# Altium PCB Solder Training Tier 1.PcbDoc
Units mil, origin at the board's own origin, x right, y up, seen from the top; angles counter-clockwise.
Board outline 3000 x 2000 mil, 2 copper layers (Top Layer, Bottom Layer); 48 components, 26 nets, 98 pads, 0 vias.
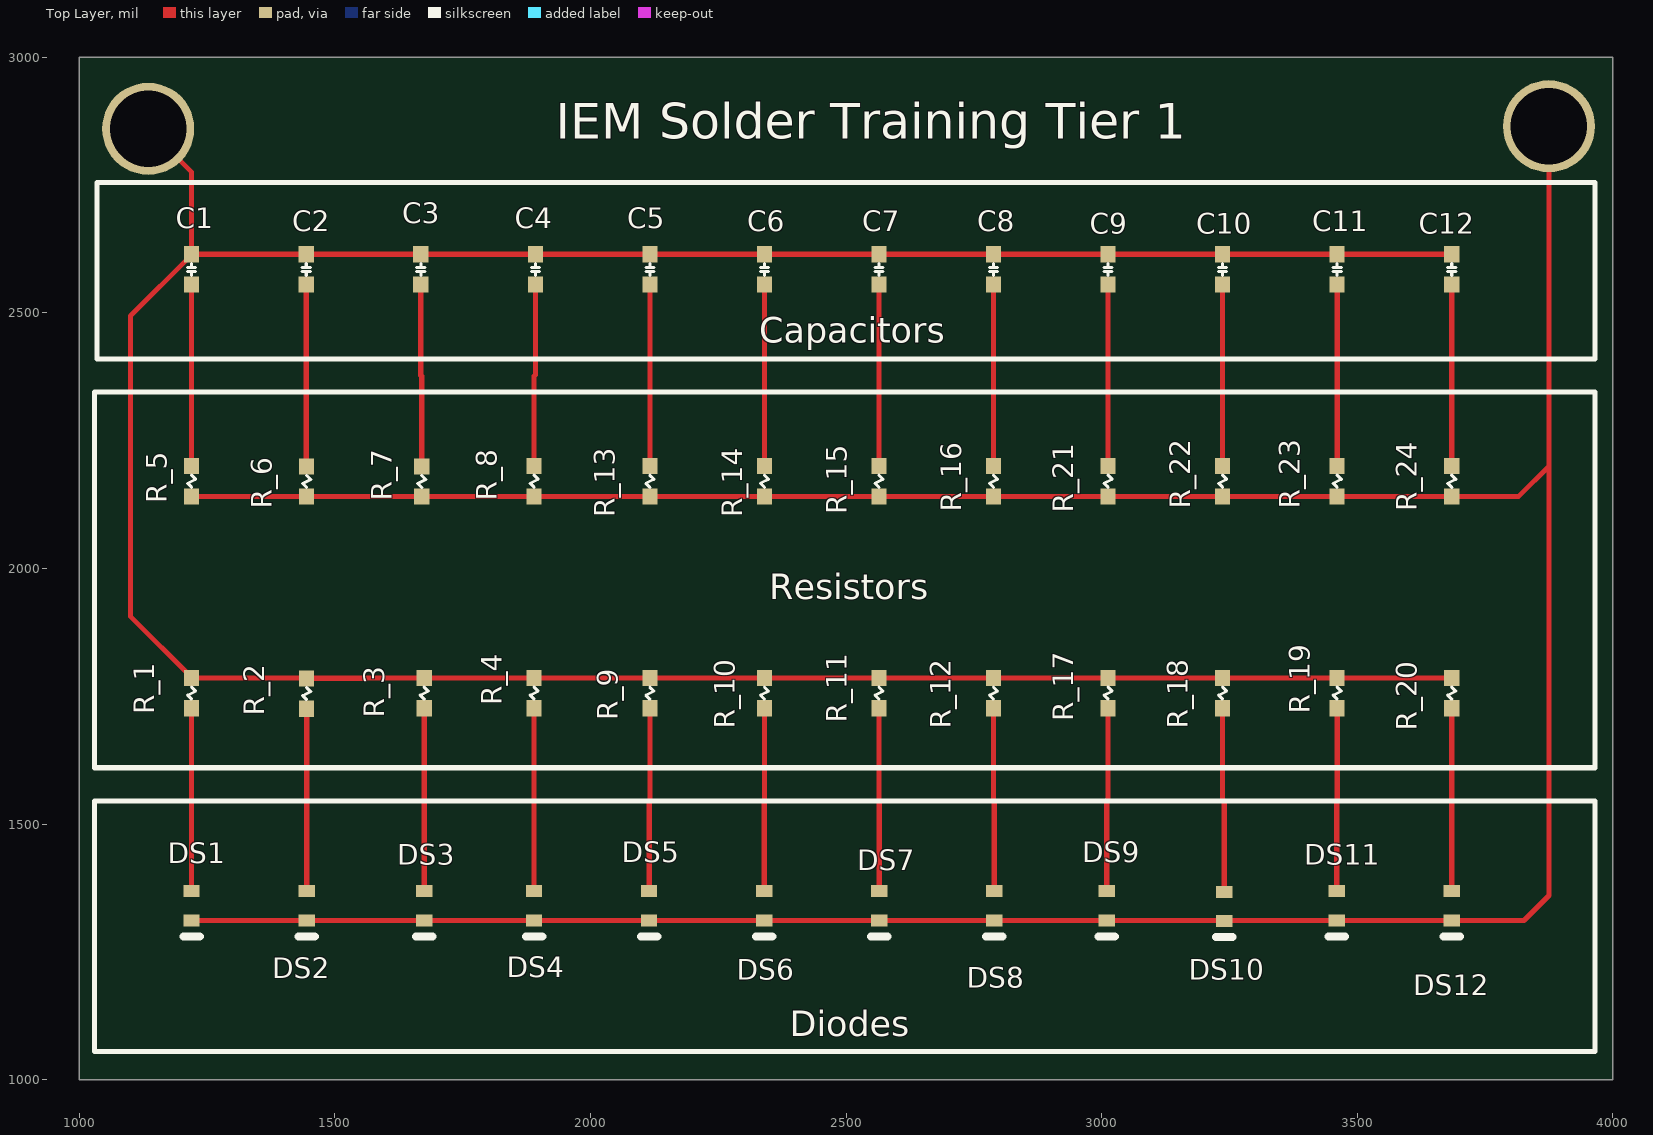
[diagram p0: Top Layer view]
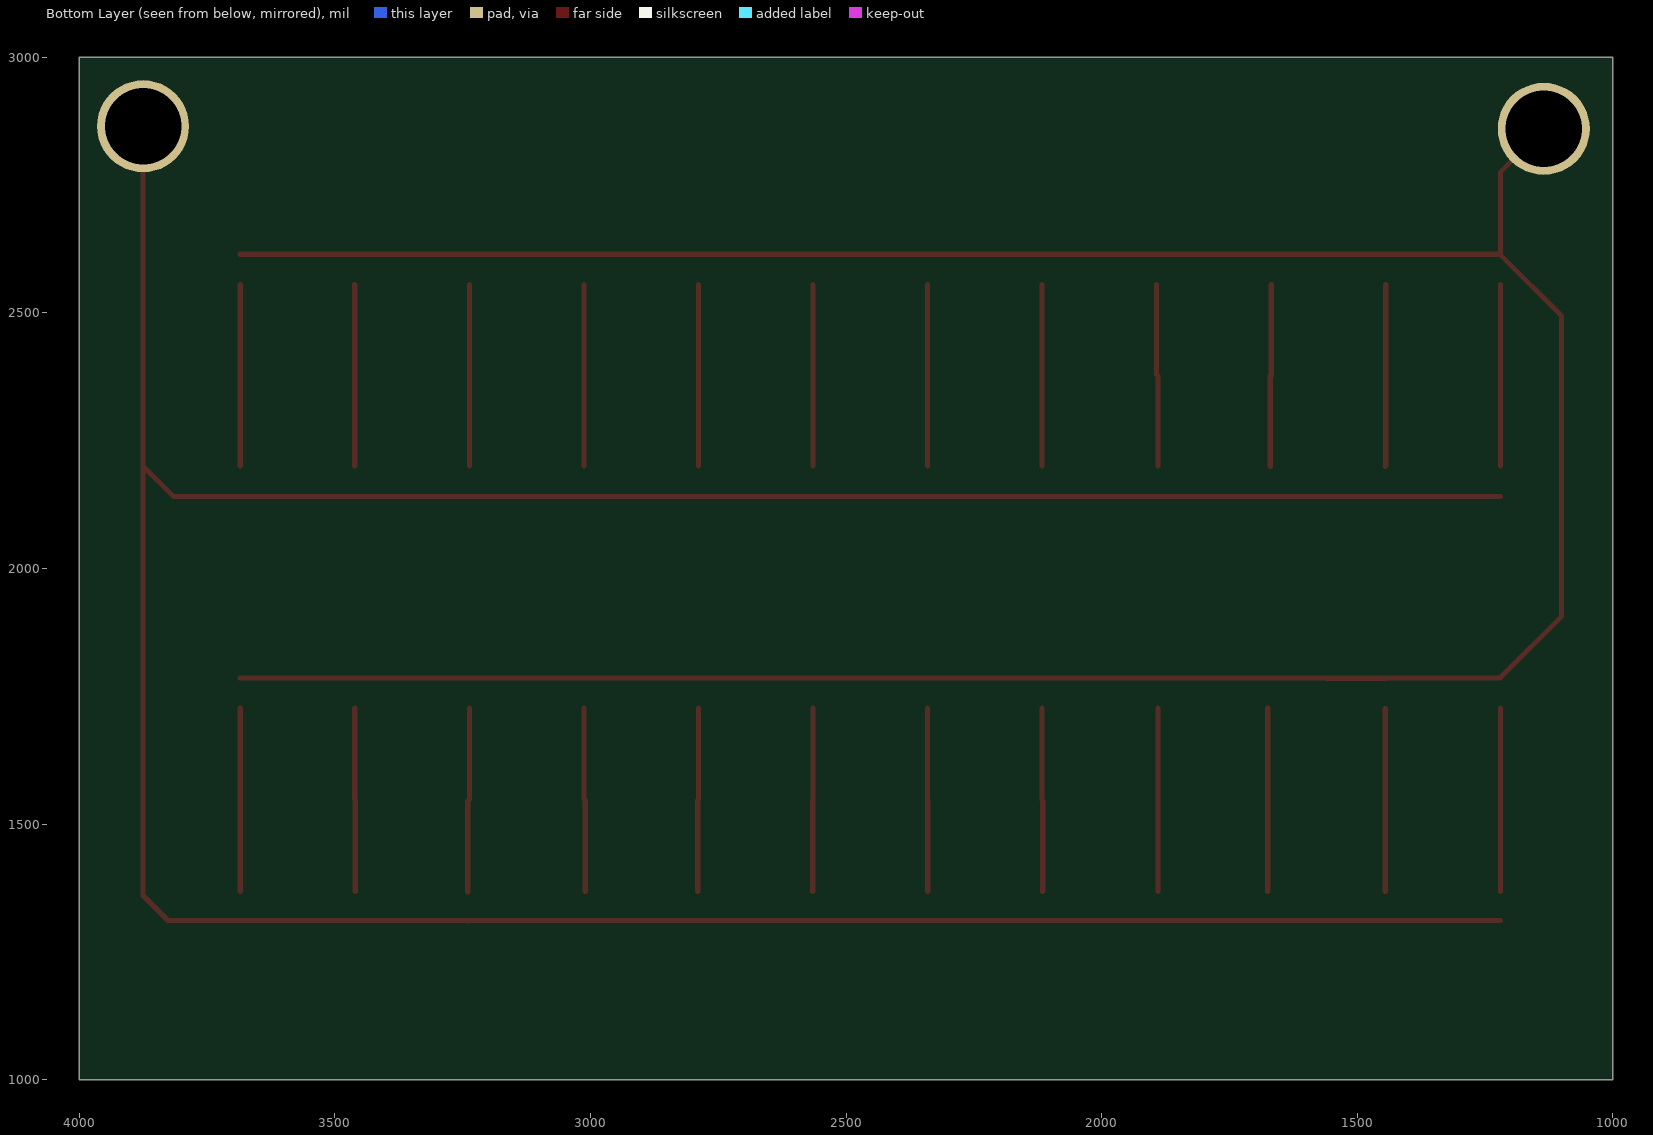
[diagram p1: Bottom Layer view, seen from below]
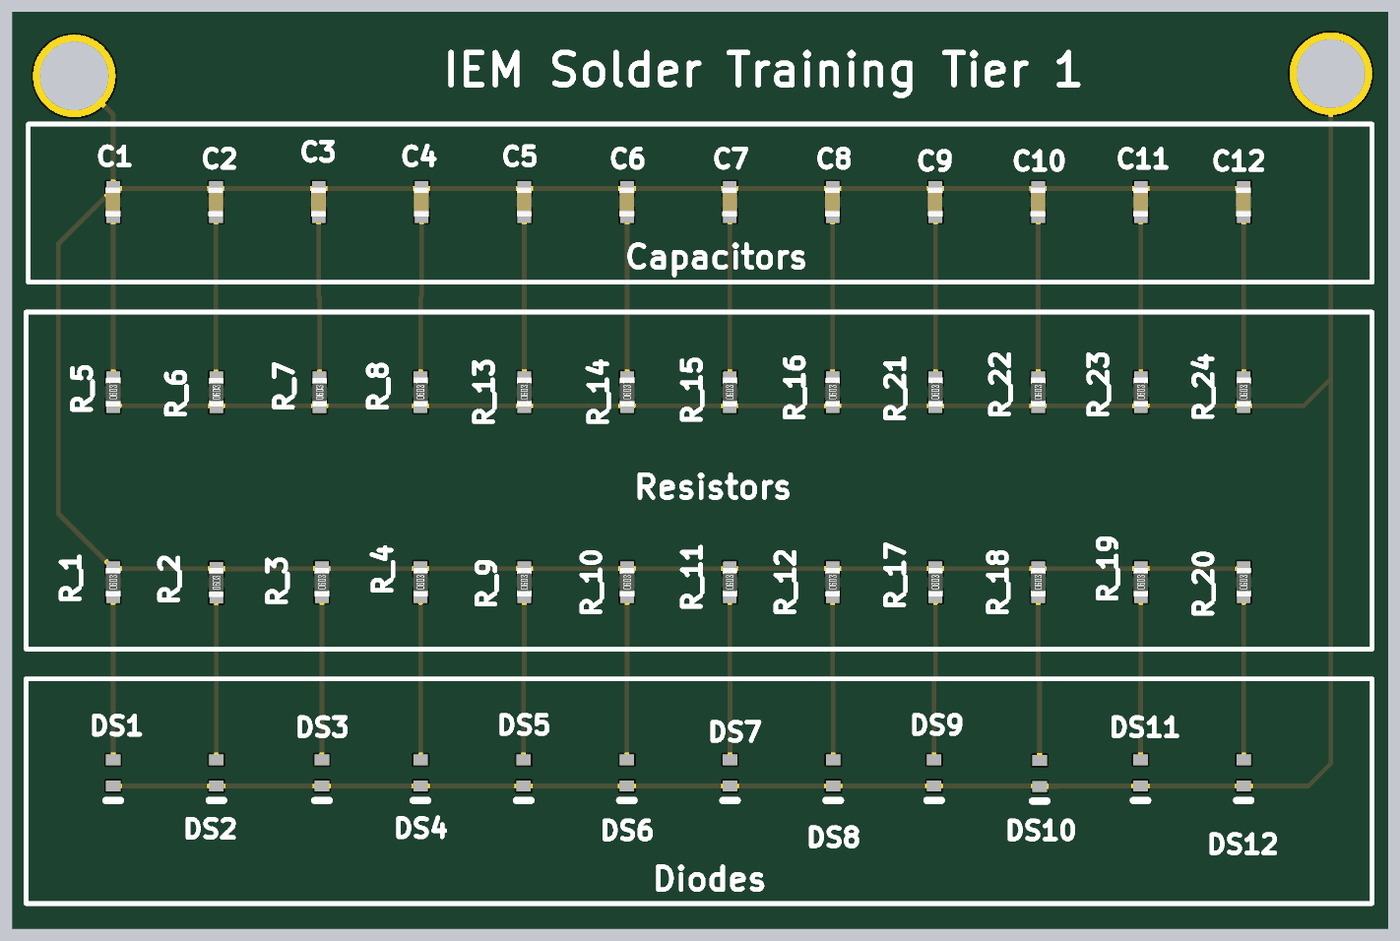
[diagram p2: 3D render of the assembled board from above, using the file's embedded part models]

## Layer stack, top to bottom
Top Solder: solder mask 0.4, Solder Resist, Dk 3.5
Top Layer: signal copper 1.4
Dielectric 1: dielectric 12.6, FR-4, Dk 4.8
Bottom Layer: signal copper 1.4
Bottom Solder: solder mask 0.4, Solder Resist, Dk 3.5

## Board outline
1000,1000 4000,1000 4000,3000 1000,3000

## Design rules (kind name [scope] priority, off if disabled: settings)
Clearance [All] p1: gap=10 ignorepadtopadclearanceinfootprint=FALSE except(0: Arc-Hole Track-Hole SMDPad-Hole THPad-Hole Via-Hole Fill-Hole Poly-Hole Region-Hole Text-Hole)
PolygonConnect [All] p1: connectstyle=Relief reliefconductorwidth=10 reliefentries=4 polygonreliefangle="90 Angle" airgapwidth=10
RoutingVias [All] p1: holewidth=28 width=50 viastyle="Through Hole" minholewidth=28 minwidth=50 maxholewidth=28 maxwidth=50
SolderMaskExpansion [All] p1: expansion=4 istentingtop=FALSE
Width [All] p1: maxlimit=10 minlimit=10 preferedwidth=10
30 further rules are at their usual default settings.

## Components (designator, comment, footprint, x,y, rotation, side; value= is the part's Value field where it differs from the comment)
C1 "4.7uF" CAP-0603 1220,2585 r90 top
C2 "4.7uF" CAP-0603 1444.09,2585 r90 top
C3 "4.7uF" CAP-0603 1668.18,2585 r90 top
C4 "4.7uF" CAP-0603 1892.27,2585 r90 top
C5 "4.7uF" CAP-0603 2116.36,2585 r90 top
C6 "4.7uF" CAP-0603 2340.45,2585 r90 top
C7 "4.7uF" CAP-0603 2564.55,2585 r90 top
C8 "4.7uF" CAP-0603 2788.64,2585 r90 top
C9 "4.7uF" CAP-0603 3012.73,2585 r90 top
C10 "4.7uF" CAP-0603 3236.82,2585 r90 top
C11 "4.7uF" CAP-0603 3460.91,2585 r90 top
C12 "4.7uF" CAP-0603 3685,2585 r90 top
DS1 "0603 RED" VISH-TLMX1100_V 1220,1340 r270 top
DS2 "0603 RED" VISH-TLMX1100_V 1445,1340 r270 top
DS3 "0603 RED" VISH-TLMX1100_V 1675,1340 r270 top
DS4 "0603 RED" VISH-TLMX1100_V 1890,1340 r270 top
DS5 "0603 RED" VISH-TLMX1100_V 2115,1340 r270 top
DS6 "0603 RED" VISH-TLMX1100_V 2340,1340 r270 top
DS7 "0603 RED" VISH-TLMX1100_V 2565,1340 r270 top
DS8 "0603 RED" VISH-TLMX1100_V 2790,1340 r270 top
DS9 "0603 RED" VISH-TLMX1100_V 3010,1340 r270 top
DS10 "0603 RED" VISH-TLMX1100_V 3240,1338.54 r270 top
DS11 "0603 RED" VISH-TLMX1100_V 3460,1340 r270 top
DS12 "0603 RED" VISH-TLMX1100_V 3685,1340 r270 top
R_1 "1k" RES-0603 1220,1755.92 r90 top
R_2 "1k" RES-0603 1445,1755 r90 top
R_3 "1k" RES-0603 1675,1755.92 r90 top
R_4 "1k" RES-0603 1890,1755.92 r90 top
R_5 "1k" RES-0603 1220,2170.46 r90 top
R_6 "1k" RES-0603 1445,2170 r90 top
R_7 "1k" RES-0603 1670,2170 r90 top
R_8 "1k" RES-0603 1890,2170.46 r90 top
R_9 "1k" RES-0603 2116.36,1755.92 r90 top
R_10 "1k" RES-0603 2340.45,1755.92 r90 top
R_11 "1k" RES-0603 2564.55,1755.92 r90 top
R_12 "1k" RES-0603 2788.64,1755.92 r90 top
R_13 "1k" RES-0603 2116.36,2170.46 r90 top
R_14 "1k" RES-0603 2340.45,2170.46 r90 top
R_15 "1k" RES-0603 2564.55,2170.46 r90 top
R_16 "1k" RES-0603 2788.64,2170.46 r90 top
R_17 "1k" RES-0603 3012.73,1755.92 r90 top
R_18 "1k" RES-0603 3236.82,1755.92 r90 top
R_19 "1k" RES-0603 3460.91,1755.92 r90 top
R_20 "1k" RES-0603 3685,1755.92 r90 top
R_21 "1k" RES-0603 3012.73,2170.46 r90 top
R_22 "1k" RES-0603 3236.82,2170.46 r90 top
R_23 "1k" RES-0603 3460.91,2170.46 r90 top
R_24 "1k" RES-0603 3685,2170.46 r90 top

## Footprints (in the part's own frame and the unit in brackets; to place one, negate y for a bottom-side part, rotate by r counter-clockwise, add the part's x,y. Pads: shape width x height; smd on the part's side, far side on the other; paste and mask are expansions set on the pad)
CAP-0603 [mm]
  rect 0.8x0.75 smd: 1(-0.75,0) 2(0.75,0)
  silkscreen extent -0.3,-0.2 0.3,0.2, body extent -0.8,-0.4 0.8,0.42, height 0.81
RES-0603 [mm]
  rect 0.8x0.75 smd: 1(-0.75,0) 2(0.75,0)
  silkscreen extent -0.3,-0.2 0.3,0.2, body extent -0.8,-0.4 0.8,0.4, height 0.44
VISH-TLMX1100_V [mm] "SMD, 2-Leads, Body 1.6x0.8mm"
  rect 0.6x0.8 smd: 1(-0.725,0) 2(0.725,0)
  silkscreen extent 1.53,-0.4 1.53,0.4, body extent -0.8,-0.4 0.8,0.4, height 0.65

## Part data
C1 C2 C3 C4 C5 C6 C7 C8 C9 C10 C11 C12: library part CMP-009-000303-1, Design Item ID=CAP-0603, Source=ife19_Elec_Library.SchLib
DS1 DS2 DS3 DS4 DS5 DS6 DS7 DS8 DS9 DS10 DS11 DS12: library part CMP-1666-00027-1, "LED, RED, 2.1 V, -40 to 100 degC, 2-Pin SMD (0603), RoHS, Tape and Reel", Capacitance="12 pF", Case Code (Imperial)=0603, Case Code (Metric)=1608, Max Operating Temperature=125degC, Min Operating Temperature=-55degC, Package Quantity=4000, Resistance="100000000000 Ohm", Tolerance=5%, Type (Capacitors)=C0G, Voltage Rating="50 V", Case/Package=0603, ComponentLink1Description="Manufacturer URL", ComponentLink1URL=http://www.vishay.com/, ComponentLink2Description=Datasheet, ComponentLink2URL=http://www.vishay.com/docs/83173/tlmb1100.pdf, DatasheetVersion="Rev. 2.7, 03/2016", Height="0.8 mm", Length="1.6 mm", Mount="Surface Mount", PackageDescription="2-Pin Surface Mount Device, Body 1.6 x 0.8 mm", PackageReference=TLMX1100, Packaging="Tape and Reel", Pins=2, Radiation Hardening=No, REACH SVHC="No SVHC", RoHSCompliant=True, Voltage Rating (DC)="50 V", Width="0.8 mm"
R_1 R_2 R_3 R_4 R_9 R_10 R_11 R_12 R_17 R_18 R_19 R_20: library part CMP-008-000136-1, Design Item ID=RES-0603, Source=ife19_Elec_Library.SchLib
R_5 R_6 R_7 R_8 R_13 R_14 R_15 R_16 R_21 R_22 R_23 R_24: library part CMP-010-000003-1, Design Item ID=RES-0603, Source=ife19_Elec_Library.SchLib

## Free pads (board coordinates)
  round 180 hole 150: 1(1135,2860) 1(3875,2865)

## Nets (pads, with @x,y where several pads share a name; then routed paths per layer and width w, separated by ;. In a path a pad name is that pad's centre, name@x,y a point inside that pad or via, vN(x,y) a via of type N, cw(c..) or ccw(c..) an arc to the next point about the centre after c; other vN are vias at no path point)
+5: C1.2 C2.2 C3.2 C4.2 C5.2 C6.2 C7.2 C8.2 C9.2 C10.2 C11.2 C12.2 pad.1@1135,2860 R_1.2 R_2.2 R_3.2 R_4.2 R_9.2 R_10.2 R_11.2 R_12.2 R_17.2 R_18.2 R_19.2 R_20.2 | length 6254.5
  Top Layer w10: pad.1@1135,2860 1220,2775 C1.2 ; R_2.2 1559,1784.53 1559.92,1785.45 ; R_20.2 R_19.2 R_18.2 R_17.2 R_12.2 R_11.2 R_10.2 R_9.2 R_4.2 R_3.2 1559.92,1785.45 ; C12.2 C11.2 C10.2 C9.2 C8.2 C7.2 C6.2 C5.2 C4.2 C3.2 C2.2 C1.2 ; C1.2 1220,2613.54 1100,2493.54 1100,1906.43 1220,1786.43 R_1.2 1559.92,1785.45
GND: DS1.2 DS2.2 DS3.2 DS4.2 DS5.2 DS6.2 DS7.2 DS8.2 DS9.2 DS10.2 DS11.2 DS12.2 pad.1@3875,2865 R_5.1 R_6.1 R_7.1 R_8.1 R_13.1 R_14.1 R_15.1 R_16.1 R_21.1 R_22.1 R_23.1 R_24.1 | length 6971.7
  Top Layer w10: DS1.2 DS2.2 DS3.2 DS4.2 DS5.2 DS6.2 DS7.2 DS8.2 DS9.2 3351.46,1311.46 ; R_5.1 1332,2140.93 1332.46,2140.47 R_6.1 1557,2140.47 R_7.1@1670,2140.93 ; R_7.1 R_7.1@1670,2140.93 ; DS10.2 3351.46,1311.46 ; pad.1@3875,2865 3875,2200 ; R_7.1@1670,2140.93 R_8.1 R_13.1 R_14.1 R_15.1 R_16.1 R_21.1 R_22.1 R_23.1 R_24.1 3815.93,2140.93 3875,2200 ; 3351.46,1311.46 DS11.2 DS12.2 3826.46,1311.46 3875,1360 3875,2200
NetC1_1: C1.1 R_5.2 | length 355.5
  Top Layer w10: R_5.2 C1.1
NetC2_1: C2.1 R_6.2 | length 356.3
  Top Layer w10: C2.1 1444.09,2200.44 R_6.2
NetC3_1: C3.1 R_7.2 | length 356.7
  Top Layer w10: C3.1 1668.18,2377.82 1670,2376 R_7.2
NetC4_1: C4.1 R_8.2 | length 356.4
  Top Layer w10: R_8.2 1890,2376 1892.27,2378.27 C4.1
NetC5_1: C5.1 R_13.2 | length 355.5
  Top Layer w10: R_13.2 C5.1
NetC6_1: C6.1 R_14.2 | length 355.5
  Top Layer w10: R_14.2 C6.1
NetC7_1: C7.1 R_15.2 | length 355.5
  Top Layer w10: R_15.2 C7.1
NetC8_1: C8.1 R_16.2 | length 355.5
  Top Layer w10: R_16.2 C8.1
NetC9_1: C9.1 R_21.2 | length 355.5
  Top Layer w10: R_21.2 C9.1
NetC10_1: C10.1 R_22.2 | length 355.5
  Top Layer w10: R_22.2 C10.1
NetC11_1: C11.1 R_23.2 | length 355.5
  Top Layer w10: R_23.2 3460.91,2377 C11.1
NetC12_1: C12.1 R_24.2 | length 355.5
  Top Layer w10: R_24.2 C12.1
NetDS1_1: DS1.1 R_1.1 | length 357.8
  Top Layer w10: DS1.1 R_1.1
NetDS2_1: DS2.1 R_2.1 | length 356.9
  Top Layer w10: DS2.1 R_2.1
NetDS3_1: DS3.1 R_3.1 | length 357.8
  Top Layer w10: DS3.1 R_3.1
NetDS4_1: DS4.1 R_4.1 | length 357.8
  Top Layer w10: DS4.1 R_4.1
NetDS5_1: DS5.1 R_9.1 | length 358.4
  Top Layer w10: DS5.1 2115,1546 2116.36,1547.36 R_9.1
NetDS6_1: DS6.1 R_10.1 | length 358
  Top Layer w10: DS6.1 2340,1547 2340.45,1547.45 R_10.1
NetDS7_1: DS7.1 R_11.1 | length 358
  Top Layer w10: R_11.1 2564.55,1547.45 2565,1547 DS7.1
NetDS8_1: DS8.1 R_12.1 | length 358.4
  Top Layer w10: R_12.1 2788.64,1547.36 2790,1546 DS8.1
NetDS9_1: DS9.1 R_17.1 | length 359
  Top Layer w10: DS9.1 3010,1546 3012.73,1548.73 R_17.1
NetDS10_1: DS10.1 R_18.1 | length 360.6
  Top Layer w10: R_18.1 3236.82,1548.18 3240,1545 DS10.1
NetDS11_1: DS11.1 R_19.1 | length 358.2
  Top Layer w10: DS11.1 3460,1547 3460.91,1547.91 R_19.1
NetDS12_1: DS12.1 R_20.1 | length 357.8
  Top Layer w10: DS12.1 R_20.1

## Silkscreen, mask and mechanical layers (free items; w line width, h text height)
Top Overlay:
  lines w10: 1030,1055 3965,1055 3965,1545 1030,1545 1030,1055 ; 1030,1610 3965,1610 3965,2345 1030,2345 1030,1610 ; 1035,2410 1035,2755 3965,2755 3965,2410 1035,2410
  text "IEM Solder Training Tier 1" at 1932,2840.33 h70
  text "Capacitors" at 2330,2441.66 h50
  text "Resistors" at 2350,1940 h50
  text "Diodes" at 2390,1085 h50
Bottom Solder:
  drawing of 3 lines, arcs and shapes, not listed